# Altium PCB PCBLedThuHongNgoai.PcbDoc
Units mil, origin at the board's own origin, x right, y up, seen from the top; angles counter-clockwise.
Board outline 6000 x 4000 mil, 2 copper layers (Top Layer, Bottom Layer); 37 components, 26 nets, 138 pads, 0 vias.
Unrouted connection lines stored in the file: 2.
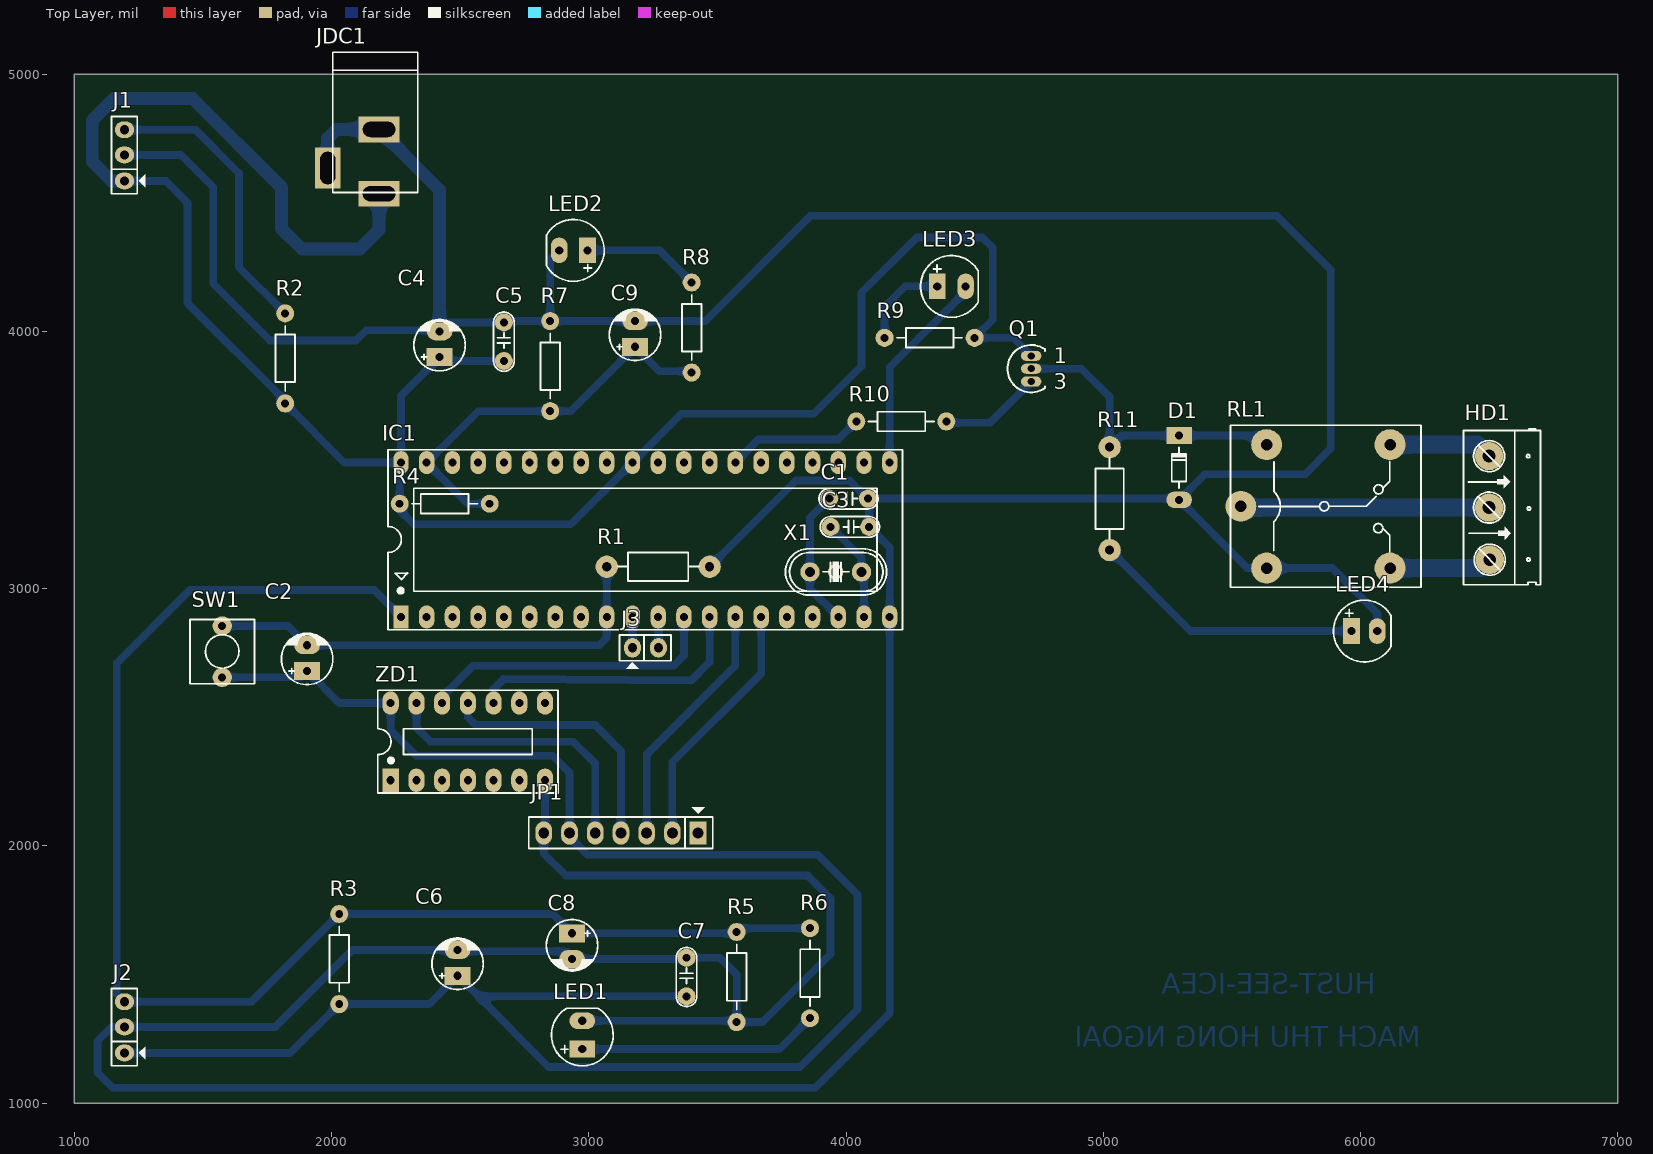
[diagram p0: Top Layer view]
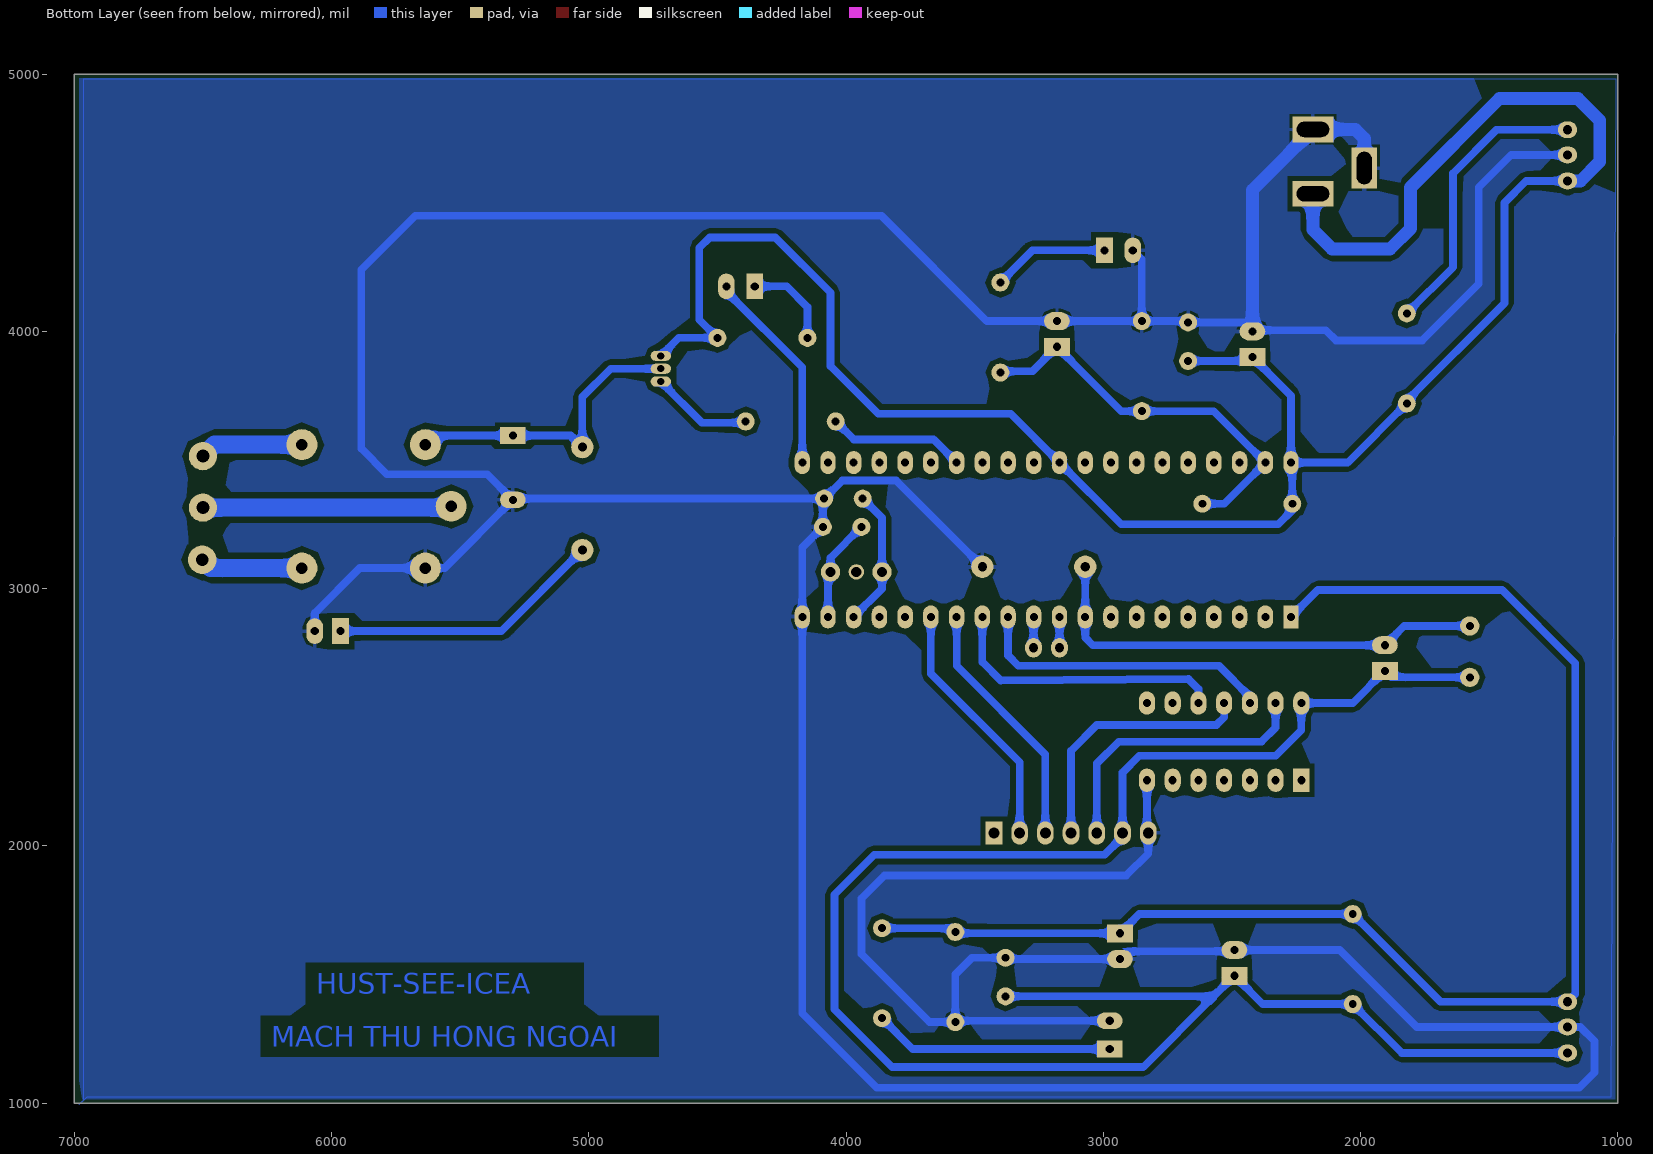
[diagram p1: Bottom Layer view, seen from below]
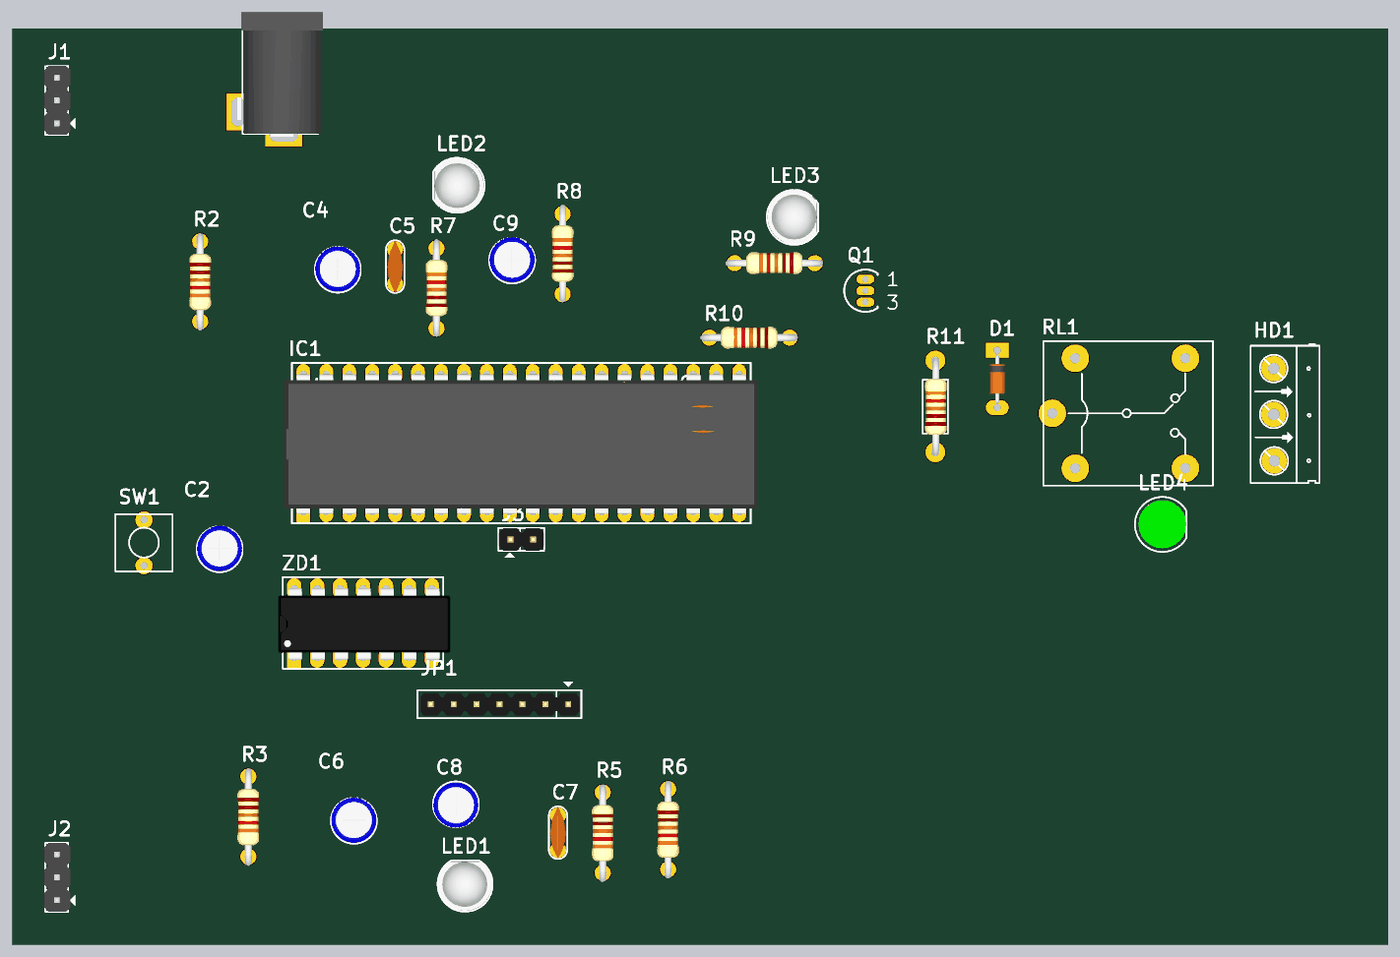
[diagram p2: 3D render of the assembled board from above, using the file's embedded part models]

## Layer stack, top to bottom
Top Solder: solder mask 0.4, Solder Resist, Dk 3.5
Top Layer: signal copper 1.4
Dielectric 1: dielectric 12.6, FR-4, Dk 4.8
Bottom Layer: signal copper 1.4
Bottom Solder: solder mask 0.4, Solder Resist, Dk 3.5

## Board outline
1000,1000 7000,1000 7000,5000 1000,5000

## Design rules (kind name [scope] priority, off if disabled: settings)
Clearance [All] p1: gap=20
PolygonConnect [All] p1: connectstyle=Relief reliefconductorwidth=15 reliefentries=4 polygonreliefangle="90 Angle" airgapwidth=10
RoutingVias [All] p1: holewidth=39.37 width=78.74 viastyle="Through Hole" minholewidth=39.37 minwidth=78.74 maxholewidth=39.37 maxwidth=78.74
SolderMaskExpansion [All] p1: expansion=4
UnpouredPolygon [All] p1: allowunpoured=FALSE
Width [All] p1: maxlimit=70 minlimit=30 preferedwidth=50
29 further rules are at their usual default settings.

## Components (designator, comment, footprint, x,y, rotation, side; value= is the part's Value field where it differs from the comment)
C1 "103" CN1.5 4085,3350 r180 top
C2 "10uF" CP1/2 1905,2680 r90 top
C3 "103" CN1.5 4090,3240 r180 top
C4 "10uF" CP1/2 2420,3900 r90 top
C5 "103" CN1.5 2670,4035 r270 top
C6 "10uF" CP1/2 2490,1495 r90 top
C7 "103" CN1.5 3380,1565 r270 top
C8 "10uF" CP1/2 2935,1660 r270 top
C9 "10uF" CP1/2 3180,3940 r90 top
D1 "1N4148" D0.5A 5295,3470 r270 top
HD1 "Header 3" HED3 6500,3515 r270 top
IC1 "AT89S52" DIP40/W0.6 2270,2890 r0 top
J1 "Jumper 3" JP3 1195,4685 r90 top
J2 "Jumper 3" JP3 1195,1295 r90 top
J3 "Jumper 2" JP2 3170,2770 r0 top
JDC1 "Jac DC" DC-IN 2085,4660 r270 top
JP1 "JP7 PIN" JP7 3425,2050 r180 top
LED1 "LED" LED-5TRED 2975,1265 r90 top
LED2 "LED" LED-5TRED 2940,4315 r180 top
LED3 "LED" LED-5TRED 4410,4175 r0 top
LED4 "LED 3mm" "LED-5 GRe" 5965,2835 r0 top
Q1 "A1015" TO-92 4720,3855 r0 top
R1 "1k" R1/2W4 3470,3085 r180 top
R2 "1k" R1/4W 1820,3720 r90 top
R3 "1k" R1/4W 2030,1385 r90 top
R4 "1k" R1/4W 2615,3330 r180 top
R5 "1k" R1/4W 3575,1315 r90 top
R6 "1k" R1/4W 3860,1330 r90 top
R7 "1k" R1/4W 2850,4040 r270 top
R8 "1k" R1/4W 3400,4190 r270 top
R9 "1k" R1/4W 4150,3975 r0 top
R10 "1k" R1/4W 4040,3650 r0 top
R11 "1k" R1/2W4 5025,3550 r270 top
RL1 "Relay 10A/12V" RL_SPDT_10A 5535,3320 r0 top
SW1 "SW" SW2 1575,2855 r270 top
X1 "4Mhz" XT2 3960,3065 r180 top
ZD1 "DIP14" DIP14/W0.3 2230,2255 r0 top

## Footprints (in the part's own frame and the unit in brackets; to place one, negate y for a bottom-side part, rotate by r counter-clockwise, add the part's x,y. Pads: shape width x height; smd on the part's side, far side on the other; paste and mask are expansions set on the pad)
CN1.5 [mil]
  round 70 hole 31: 1(0,0) 2(150,0)
  silkscreen extent -40,-40 190,40, body extent -40,-33 190,33, height 235
CP1/2 [mil] "Tu hoa < 22uF/16>50V"
  rect 70x100 hole 32: 1(0,0)
  oval 70x100 hole 32: 2(100,0)
  silkscreen extent -53,-100 146,100, body extent -49,-99 149,99, height 287
D0.5A [mil] "Diode muoi, W 80mil, L 300mil"
  oval 65x100 hole 32: 1(125,0)
  rect 65x100 hole 32: 2(-125,0)
  silkscreen extent -80,-30 80,28, body extent -108,-33 108,32, height 61
DC-IN [mil] "Jac DC input"
  rect 100x160 hole 59.06 slot 125.98 at 90 deg: 1(125,100) 2(-125,100)
  rect 160x100 hole 59.06 slot 125.98 at 0 deg: 3(25,-100)
  silkscreen extent -425,-80 120,250, body extent -410,-105 134,269, height 434
DIP14/W0.3 [mm] "14PIN, W 300mil, Pin to pin 100mil"
  rect 1.6x2.3 hole 0.8: 1(0,0)
  oval 1.6x2.3 hole 0.8: 2(2.54,0) 3(5.08,0) 4(7.62,0) 5(10.16,0) 6(12.7,0) 7(15.24,0) 8(15.24,7.62) 9(12.7,7.62) 10(10.16,7.62) 11(7.62,7.62) 12(5.08,7.62) 13(2.54,7.62) 14(0,7.62)
  silkscreen extent -1.28,-1.27 16.51,8.89, body extent -1.78,-0.32 17.27,7.68, height 3.7
DIP40/W0.6 [mil] "40 PIN, W 600mil, Pin to pin 100mil"
  rect 60x90 hole 31: 1(0,0)
  oval 60x90 hole 31: 2(100,0) 3(200,0) 4(300,0) 5(400,0) 6(500,0) 7(600,0) 8(700,0) 9(800,0) 10(900,0) 11(1000,0) 12(1100,0) 13(1200,0) 14(1300,0) 15(1400,0) 16(1500,0) 17(1600,0) 18(1700,0) 19(1800,0) 20(1900,0) 21(1900,600) 22(1800,600) 23(1700,600) 24(1600,600) 25(1500,600) 26(1400,600) 27(1300,600) 28(1200,600) 29(1100,600) 30(1000,600) 31(900,600) 32(800,600) 33(700,600) 34(600,600) 35(500,600) 36(400,600) 37(300,600) 38(200,600) 39(100,600) 40(0,600)
  silkscreen extent -50,-50 1950,650, body extent -82,-10 1982,600, height 224
HED3 [mil] "Header 3, 3 pin, hight 300mil, Pin to Pin 200, Colour Green"
  round 110 hole 50: 1(0,0) 2(200,0) 3(402.62,2.62)
  silkscreen extent -106,-100 500,200
JP2 [mil]
  oval 65x75 hole 36: 1(0,0) 2(101,0)
  silkscreen extent -50,-81 150,50, body extent -48,-50 148,48, height 323
JP3 [mil] "Jumper 3"
  oval 65x75 hole 36: 1(-100,0) 2(1,0) 3(99,0)
  silkscreen extent -150,-81 150,50, body extent -150,-60 150,55, height 355
JP7 [mil] "JP7"
  rect 65x90 hole 42: 1(0,0)
  oval 65x90 hole 42: 2(100,0) 3(200,0) 4(300,0) 5(400,0) 6(500,0) 7(600,0)
  silkscreen extent -57,-100 658,60, body extent -50,-49 646,49, height 323
"LED-5 GRe" [mil] "LED 2 PIN, 5 ly , Only colour,pin to pin 100mil"
  rect 65x100 hole 32: 1(0,0)
  oval 65x100 hole 32: 2(100,0)
  silkscreen extent -70,-120 154,120, body extent -54,-104 154,105, height 337
LED-5TRED [mil] "LED 2 PIN, 5 ly , Only colour, pin to pin 110mil"
  rect 65x100 hole 32: 1(-55,0)
  oval 65x100 hole 32: 2(55,0)
  silkscreen extent -120,-120 104,120, body extent -116,-117 98,120, height 339
R1/2W4 [mm] "R 1/2W, 2 pin, 400mil"
  round 2.2 hole 0.9: 1(0,0) 2(10.16,0)
  silkscreen extent 1.07,-1.4 9.04,1.4, body extent -0.29,-1.16 10.51,1.24, height 2.32
R1/4W [mil] "R 1/4W, 2 Pin, 350mil"
  round 70 hole 31: 1(0,0) 2(350,0)
  silkscreen extent 48,-38 302,38, body extent -40,-47 386,47, height 111
RL_SPDT_10A [mil] "Relay SPDT, 5 pin, 10A,W 650mil, L 800mil, H 800mil"
  round 120 hole 45: 1(0,0) 2(580,240) 3(580,-240) 4(100,-240) 5(100,240)
  silkscreen extent -40,-315 700,315
SW2 [mil] "SW button 2pin, 250x 250 mil"
  round 75 hole 31: 1(0,0) 2(200,0)
  silkscreen extent -25,-125 225,125
TO-92 [mm] "TO, Flat Index; 3 In-Line, Axial Leads; Body Dia. 4.6mm; Leads 0.41 x 0.39 mm (max)"
  oval 2x1 hole 0.7: 1(0,1.27) 2(0,0) 3(0,-1.27)
  silkscreen extent -2.34,-2.34 1.35,2.34
XT2 [mm] "Footpin for Crystal 2 pin"
  round 1.524 hole 1: 0(0,0)
  round 1.905 hole 1: 1(-2.54,0) 2(2.54,0)
  silkscreen extent -5.03,-2.29 4.96,2.29, body extent -5.93,-2.36 5.42,2.29, height 3.5

## Part data
C1 C3 C5 C7: library part CN1.5, "Cap np 682pF => 104pF"
C2 C4 C6 C8 C9: library part CP1, "Cap P  0,1uF < 22uF , 16 - 50V"
D1: library part D0.5A, "1N4148/D 0.5A"
HD1: library part Hed3, "Header 3 (Green)"
IC1: "AT89S52, 8k Byte Flash Memory , 40 Pin"
J1 J2: library part JP3
J3: library part "JP 2"
JDC1: library part "JACK DC", "Jac DC input"
JP1: library part JP7
LED1 LED2 LED3 LED4: "LED Single colour Green and Red"
Q1: "PNP 600mW, ECB"
R1 R11: library part R1/4W, "Resistor 1/4W"
R2 R3 R4 R5 R6 R7 R8 R9 R10: library part R, "Resistor 1/4W"
RL1: library part "Relay 1", "Relay SPDT,10A - 12VDC 5 Pin"
SW1: library part SW2, "Switch button 2 pin"
X1: library part XT2, "Crystal For all Crystal 2pin."

## Nets (pads, with @x,y where several pads share a name; then routed paths per layer and width w, separated by ;. In a path a pad name is that pad's centre, name@x,y a point inside that pad or via, vN(x,y) a via of type N, cw(c..) or ccw(c..) an arc to the next point about the centre after c; other vN are vias at no path point)
/D0: IC1.12 ZD1.12 | length 1181.3
  Bottom Layer w30: ZD1.12 2430,2580 2550,2700 3330,2700 3370,2740 IC1.12
/D1: IC1.13 ZD1.10 | length 1115.8
  Bottom Layer w30: ZD1.10 2630,2610 2668.42,2648.42 3398.01,2643.01 3470,2715 IC1.13
AL1: C1.2 IC1.18 X1.2 | length 536.6
  Bottom Layer w30: C1.2 3860,3275 X1.2 3860,3000 IC1.18
AL2: C3.2 IC1.19 X1.1 | length 389.7
  Bottom Layer w30: C3.2 4060,3120 X1.1 ; IC1.19 X1.1@4070,3055
D2: IC1.14 JP1.3 | length 952.9
  Bottom Layer w30: JP1.3@3225,2080 3225,2355 3570,2700 IC1.14
D3: IC1.15 JP1.2 | length 982.9
  Bottom Layer w30: JP1.2 3325,2325 3670,2670 IC1.15
GND: C1.1 C3.1 C4.2 C5.1 C6.2 C7.1 C8.2 C9.2 D1.1 IC1.20 J1.2 J2.2 JDC1.2 JDC1.3 JP1.7 LED1.2 LED2.2 LED4.2 R1.1 R5.1 R7.1 RL1.4 ZD1.7 | length 22333.4
  Bottom Layer w30: J1.2 1414,4686 1540,4560 1540,4185 1760,3965 2095,3965 2135,4005 2415,4005 C4.2 2455,4035 C5.1 2675,4040 R7.1 ; JP1.7 2825,1970 2910,1885 3850,1885 3940,1795 3940,1580 3675,1315 R5.1 3575,1500 3510,1565 C7.1 ; JP1.7@2830,2055 ZD1.7 ; LED2.2 2850,4280 R7.1 ; LED1.2 R5.1@3570,1320 ; C7.1@3375,1560 C8.2 2905,1590 2495,1590 C6.2 2080,1595 1781,1296 J2.2 1146,1296 1090,1240 1090,1120 1150,1060 3880,1060 4170,1350 IC1.20 4170,3160 C3.1 C1.1@4090,3345 ; R1.1 3805,3420 4015,3420 C1.1 D1.1@5265,3350 ; LED4.2 6065,2905 5890,3080 RL1.4 5560,3080 D1.1 5395,3445 5785,3445 5885,3545 5885,4240 5675,4450 3862.14,4450 3452.14,4040 C9.2 R7.1
  Bottom Layer w50: JDC1.3 1985,4750 2020,4785 JDC1.2 2420,4550 C4.2
NetD1_2: D1.2 Q1.2 R11.1 RL1.5 | length 1188.7
  Bottom Layer w30: Q1.2 4915,3855 5025,3745 R11.1 5070,3595 D1.2 5600,3595 RL1.5
NetHD1_1: HD1.1 RL1.2 | length 403.6
  Bottom Layer w70: RL1.2 6455,3560 HD1.1
NetHD1_2: HD1.2 RL1.1 | length 967.1
  Bottom Layer w70: RL1.1 5540,3315 HD1.2
NetHD1_3: HD1.3 RL1.3 | length 401
  Bottom Layer w70: RL1.3 6470.24,3080 HD1.3
NetIC1_10: IC1.10 J3.1 | length 120
  Bottom Layer w30: J3.1 IC1.10
NetIC1_11: IC1.11 J3.2 | length 134
  Bottom Layer w30: IC1.11@3270,2875 IC1.11 ; J3.2 IC1.11@3271,2889
NetIC1_21: IC1.21 LED3.2 | length 807.2
  Bottom Layer w30: IC1.21 4170,3860 4465,4155 LED3.2
NetIC1_27: IC1.27 R10.1 | length 536.3
  Bottom Layer w30: IC1.27 3660,3580 3970,3580 R10.1
NetJP1_4: JP1.4 ZD1.11 | length 1023.8
  Bottom Layer w30: ZD1.11 2530,2500 2560,2470 3025,2470 3125,2370 JP1.4
NetJP1_5: JP1.5 ZD1.13 | length 1118
  Bottom Layer w30: ZD1.13 2330,2460 2385,2405 2940,2405 3025,2320 JP1.5
NetLED1_1: LED1.1 R6.1 | length 934.7
  Bottom Layer w30: LED1.1 3740,1210 R6.1
NetLED2_1: LED2.1 R8.1 | length 456.8
  Bottom Layer w30: LED2.1 3275,4315 R8.1
NetLED3_1: LED3.1 R9.1 | length 358.1
  Bottom Layer w30: R9.1 4150,4095 4230,4175 LED3.1
NetLED4_1: LED4.1 R11.2 | length 1070.5
  Bottom Layer w30: R11.2 5340,2835 LED4.1
NetQ1_3: Q1.3 R10.2 | length 391.3
  Bottom Layer w30: R10.2@4395,3645 4560,3645 Q1.3
OUT1: C9.1 IC1.39 J1.3 R2.2 R4.1 R7.2 R8.2 | length 2696.6
  Bottom Layer w30: J1.3 1471,4784 1640,4615 1640,4250 R2.2 ; R4.1 2530,3330 IC1.39 2570,3690 R7.2 2930,3690 C9.1 3275,3845 R8.2@3395,3845
OUT2: C8.1 IC1.1 J2.3 R3.2 R5.2 R6.2 | length 5440.6
  Bottom Layer w30: IC1.1 2165,2995 1450,2995 1165,2710 1165,1424 J2.3 1689,1394 R3.2 2860,1735 C8.1 3570,1660 R5.2 3590,1680 R6.2
RST: C2.2 IC1.9 R1.2 SW1.1 | length 1813.5
  Bottom Layer w30: SW1.1 1830,2855 C2.2 3040,2780 3070,2810 IC1.9 R1.2
VCC: C2.1 C4.1 C5.2 C6.1 C7.2 IC1.31 IC1.40 J1.1 J2.1 JDC1.1 JP1.6 Q1.1 R2.1 R3.1 R4.2 R9.2 SW1.2 ZD1.14 | length 15726.5
  Bottom Layer w30: J2.1 1840,1195 R3.1 2380,1385 C6.1 2570,1415 ; J1.1 1355,4585 1440,4500 1440,4110 1820,3730 R2.1 2050,3490 IC1.40 2270,3750 2405,3885 C5.2 ; SW1.2 1880,2655 C2.1 2030,2555 ZD1.14 2230,2450 2330,2350 2860,2350 2925,2285 JP1.6 2925,2035 2995,1965 3890,1965 4045,1810 4045,1365 3820,1140 2845,1140 2570,1415 ; R4.2@2265,3305 2320,3250 2930,3250 IC1.31 3360,3680 3875,3680 4060,3865 4060,4150 4275,4365 4530,4365 4570,4325 4570,4045 R9.2 4650,3975 Q1.1 ; R4.2 IC1.40@2265,3485 ; C7.2 2570,1415
  Bottom Layer w50: J1.1 1145,4585 1070,4660 1070,4820 1155,4905 1460,4905 1805,4560 1805,4400 1885,4320 2110,4320 2185,4395 JDC1.1
pads on no net: IC1.2 IC1.3 IC1.4 IC1.5 IC1.6 IC1.7 IC1.8 IC1.16 IC1.17 IC1.22 IC1.23 IC1.24 IC1.25 IC1.26 IC1.28 IC1.29 IC1.30 IC1.32 IC1.33 IC1.34 IC1.35 IC1.36 IC1.37 IC1.38 JP1.1 X1.0 ZD1.1 ZD1.2 ZD1.3 ZD1.4 ZD1.5 ZD1.6 ZD1.8 ZD1.9

## Polygon pours and split planes (outlines as drawn)
GND on Bottom Layer "Bottom Layer-No Net" (solid, remove dead copper, pour order 9): 1000,5000 1015,4985 6980,4985 6980,1015 6975,1010 6970,1015 1010,1015 1010,4980 1005,4985
GND on Bottom Layer "Bottom Layer-No Net" (solid, remove dead copper, shelved, pour order 4): 1005,4980 6965,4980 6965,1010 6980,995 6950,1025 1025,1025

## Other copper
Bottom Layer:
  text "HUST-SEE-ICEA" at 6060,1425 h80
  text "MACH THU HONG NGOAI" at 6235,1220 h80

## Text inside footprints (layer, text, board x,y; h text height)
Q1: Top Overlay "3" at 4807.56,3774.88 h59.05; Top Overlay "1" at 4807.56,3877.05 h59.05